# EAGLE board Millennium-Turkey.postroute (EAGLE 7.4.0)
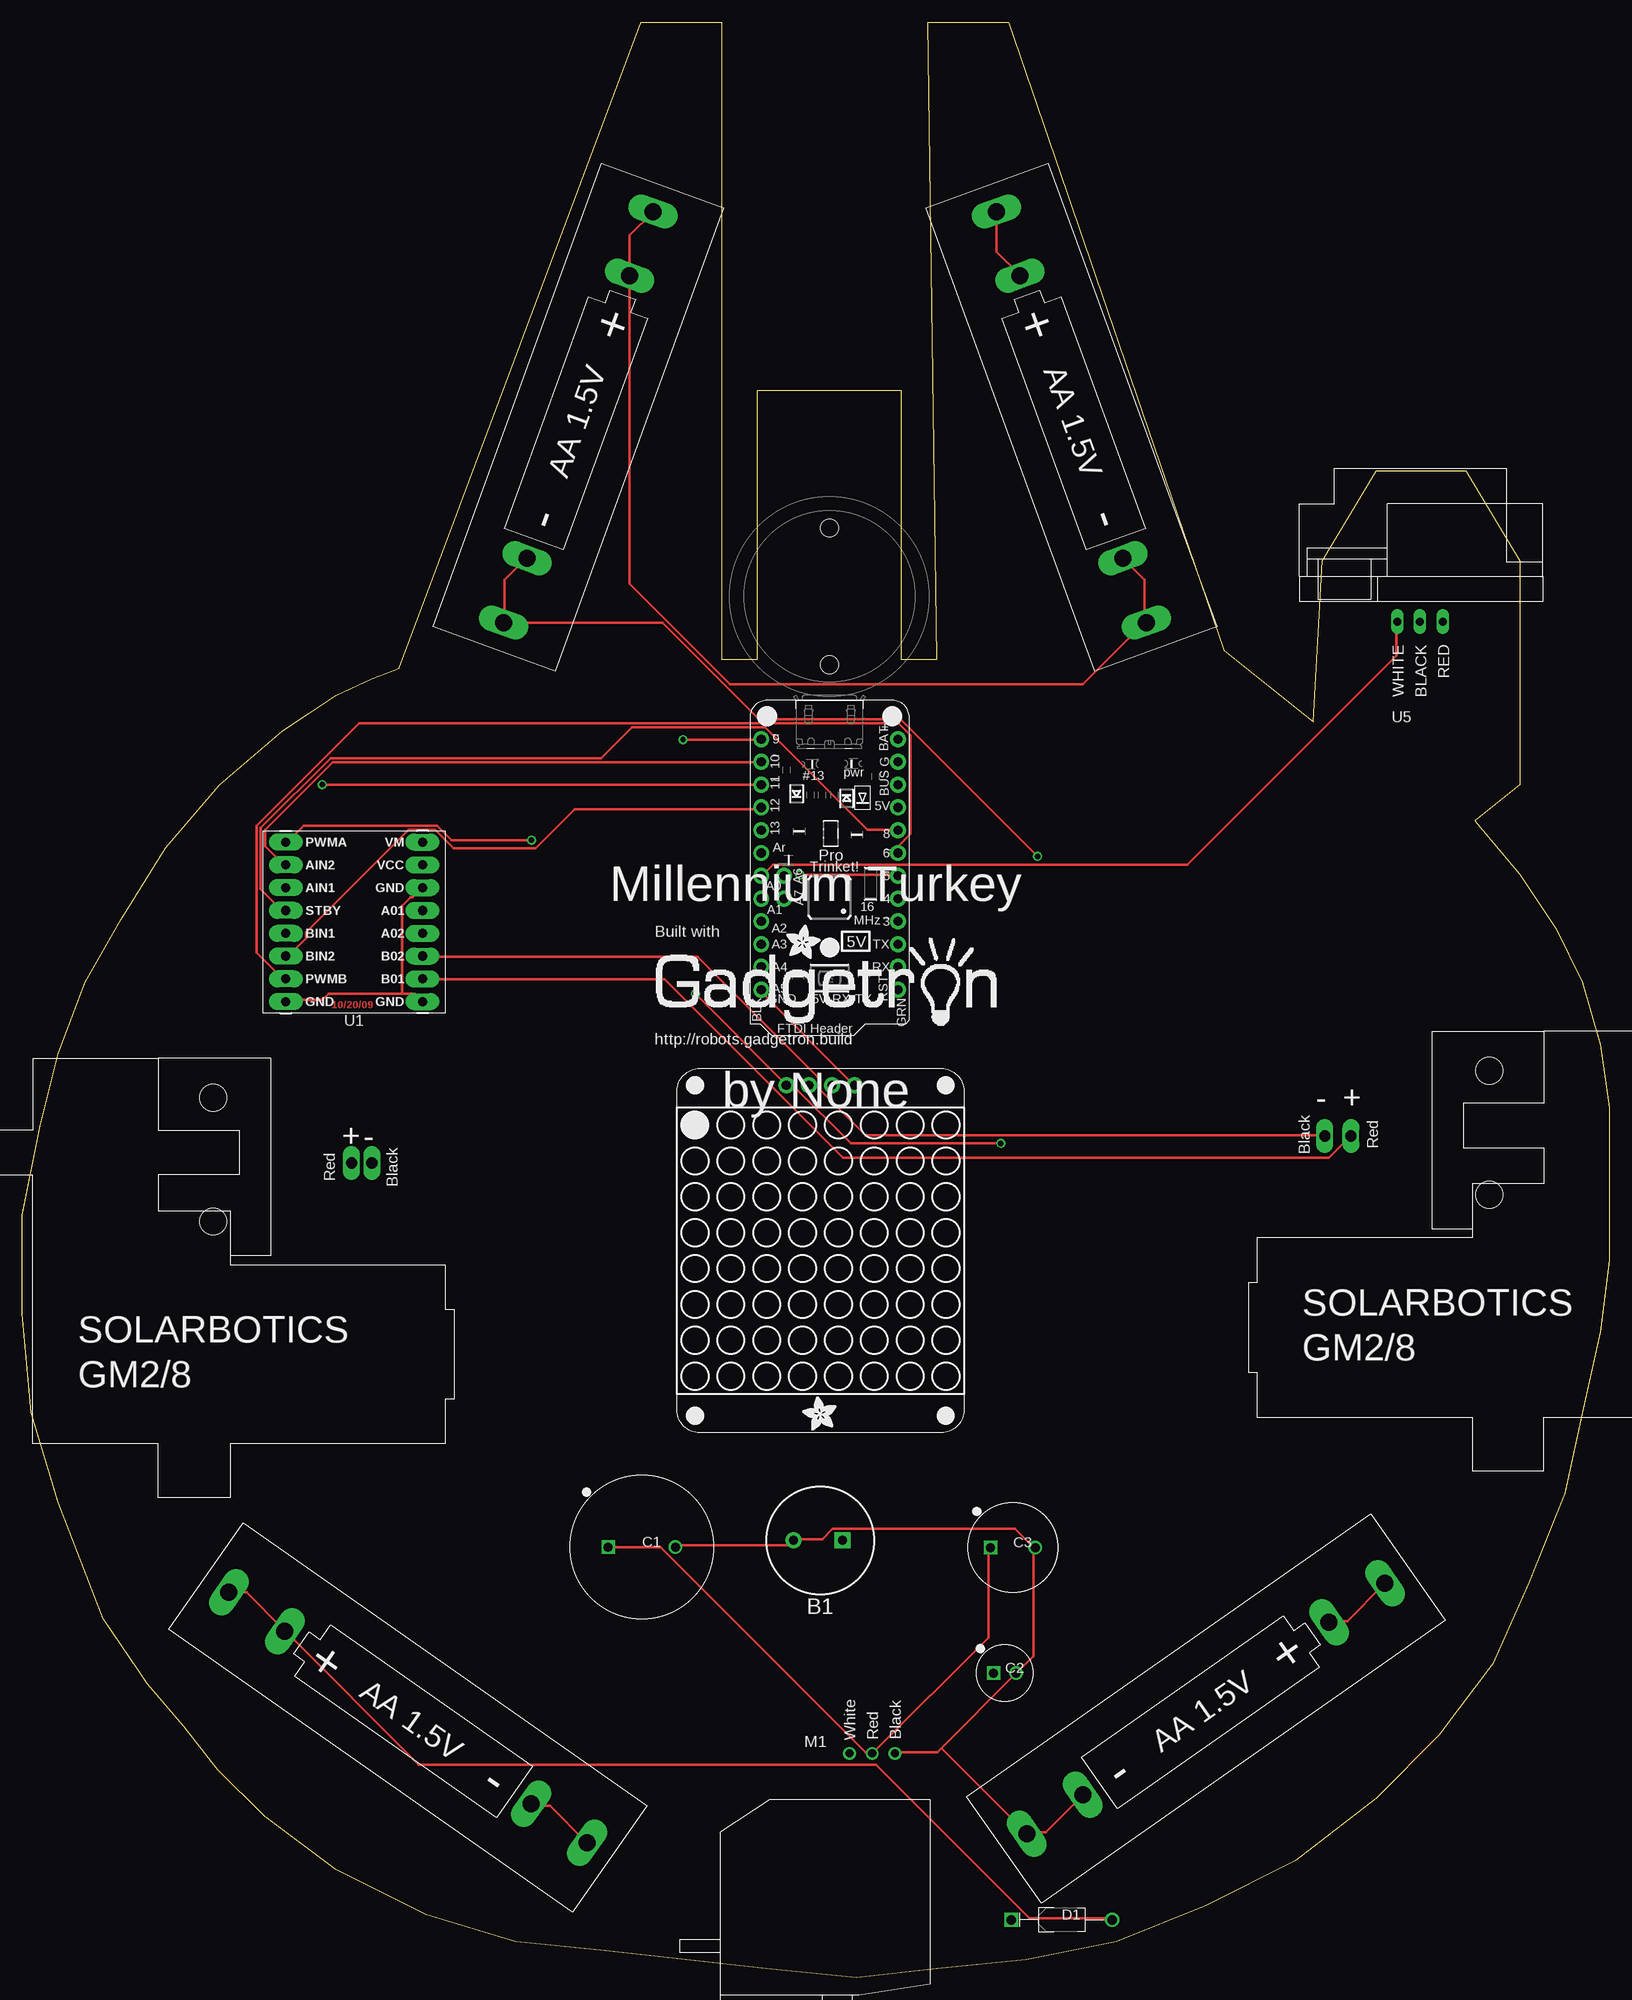
[diagram p0: board, top side]
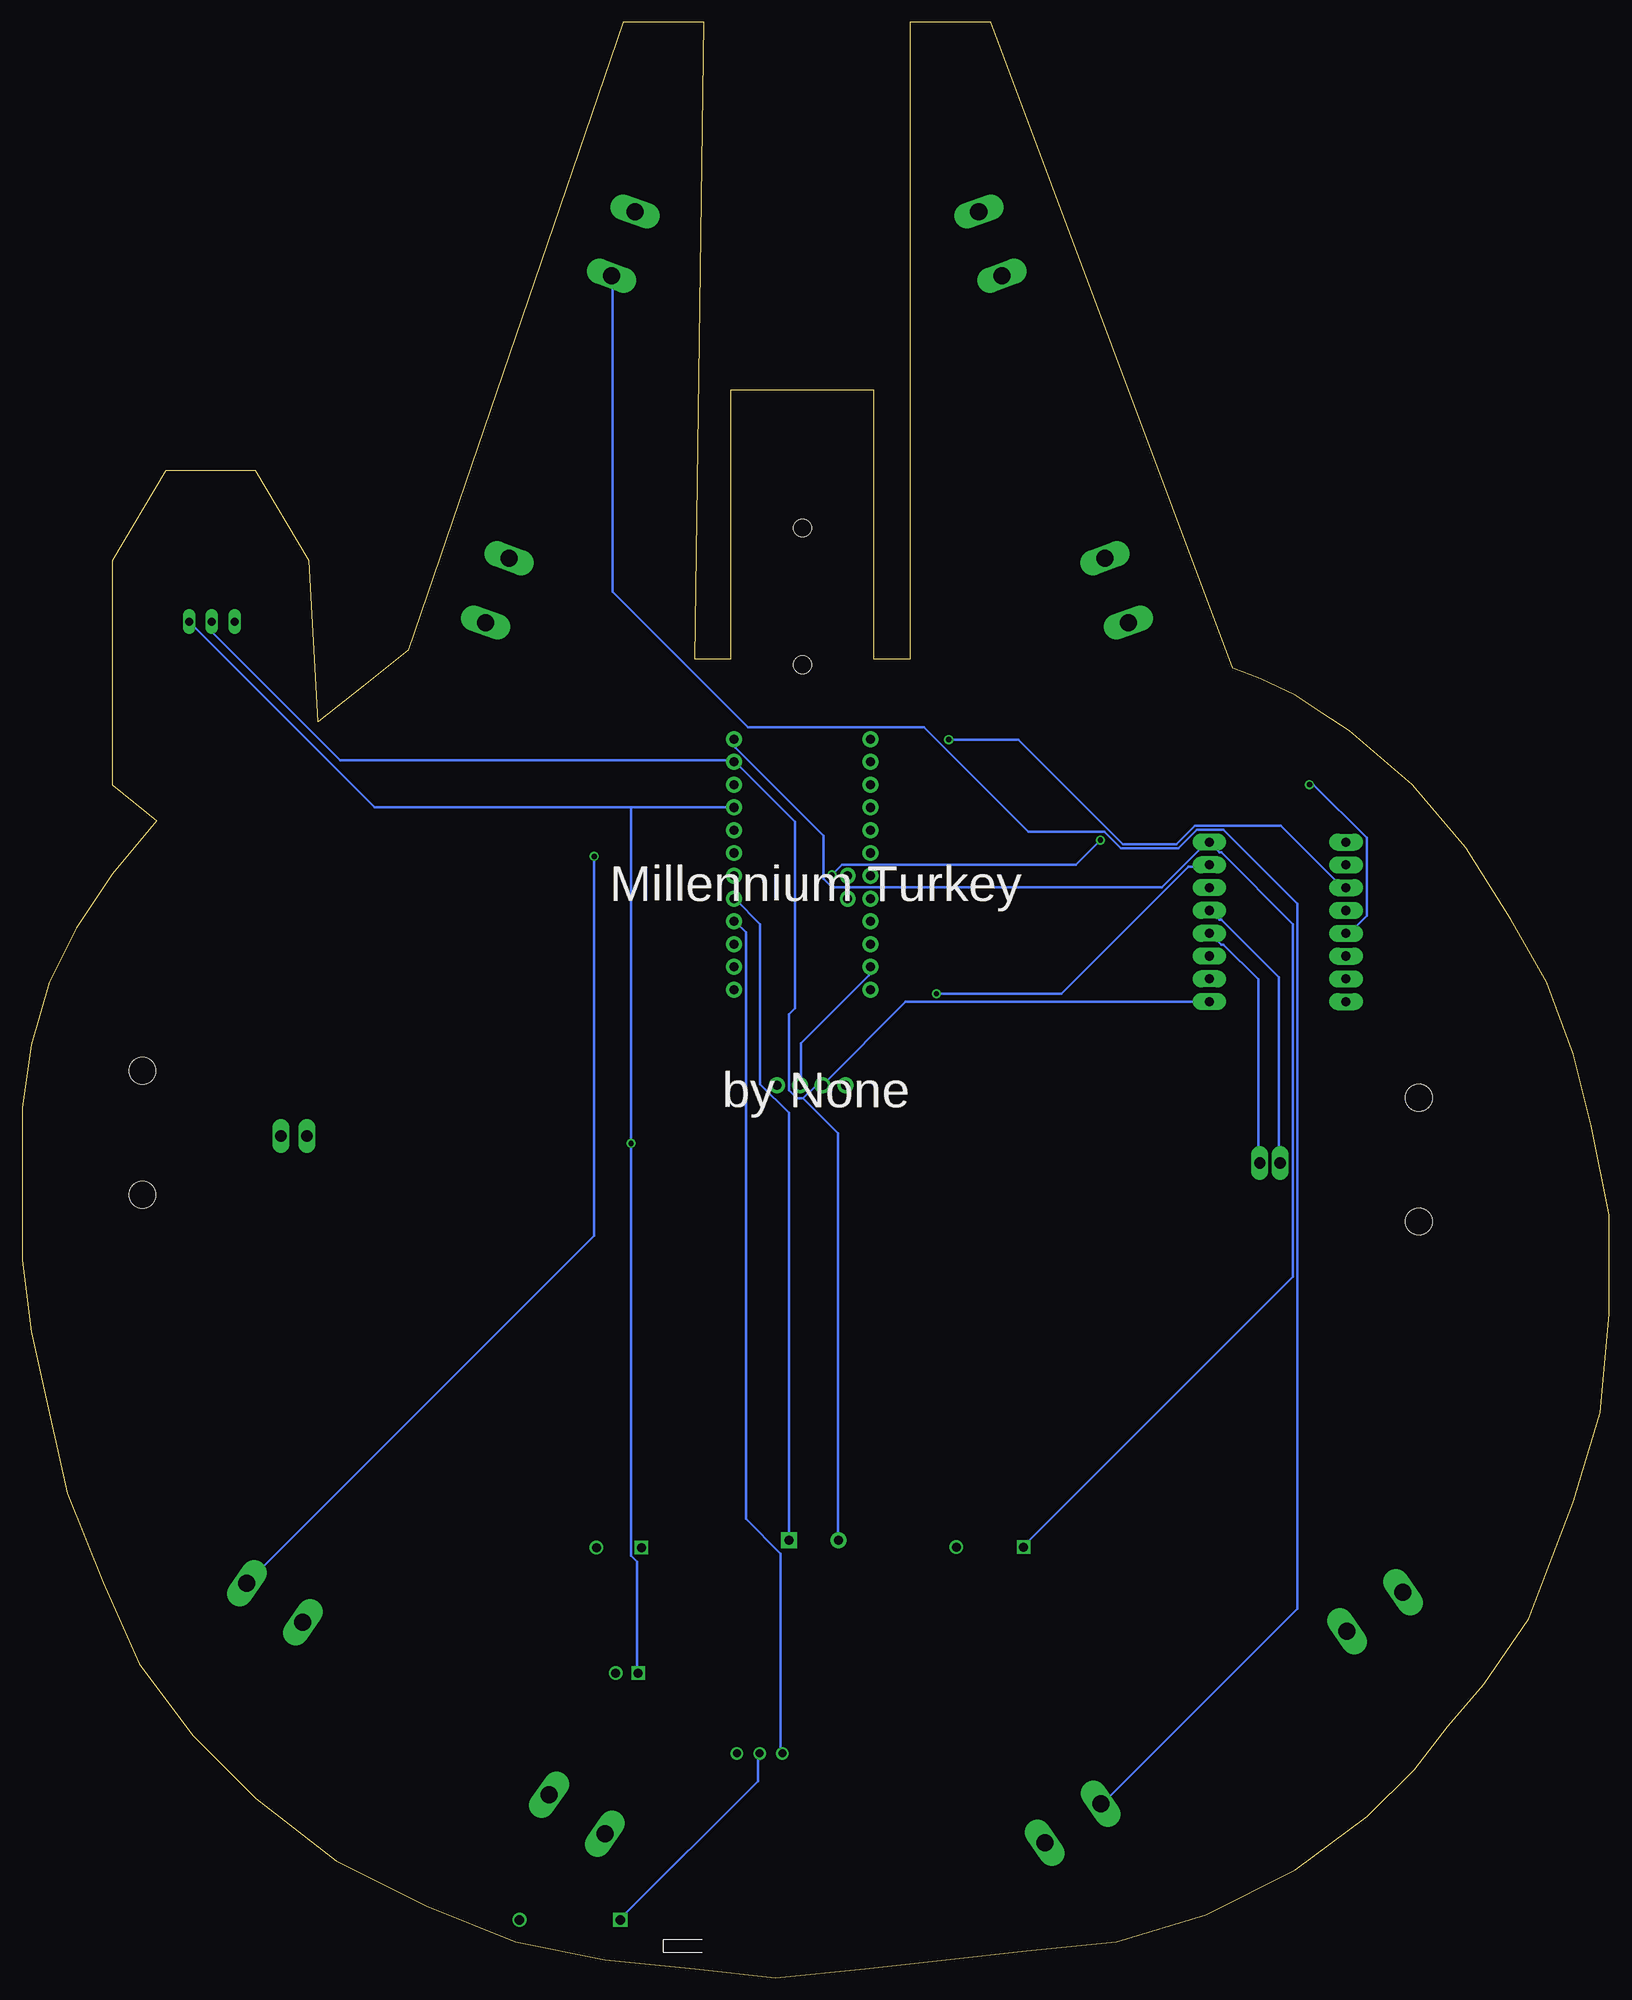
[diagram p1: board, bottom side, seen from below]

Size 177 x 218 mm. Coordinates in mm from the lower left corner, seen from the top.
Outline: 55,4 45,7 35,12 27,18 21.76,23.19 18,28 13.98,32.73 9,40 4,53 1,63 0,74 0,85 2,95 4,103 7,111 11,118 16,126 22,133 29,139 32,141 35,143 38.95,144.8 42,146 69,218 78,218 78,147 82,147 82,177 98,177 98,147 102,147 101,218 110,218 134,148 139,144 144,140 145,158 151,168 161,168 167,158 167,145 167,139 167,133 162,129 167,123 171,117 174,111 176,104 177,97 177,89 177,80 176,72 174,63 172,54 168,44 164,35 158,27 151,20 142,13 132,8 122,4 112,2 102,1 93,0 83,1 74,2 65,3 55,4
Copper layers (1*16): Top 0.035mm / dielectric 1.5mm / Bottom 0.035mm
Design rules "default": minimum track width 10mil, minimum drill 0.6mm, track to track 8mil, track to pad 8mil, pad to pad 8mil, via to via 8mil, smd to smd 8mil, copper to edge 40mil, drill to drill 8mil, minimum pad ring 10mil, minimum via ring 8mil, stop-mask expansion 4mil, vias tented up to drill 0mil, thermal gap 10mil

## Footprints (pad centres in the part's own frame; a part is rotated, then mirrored left to right if it is on the bottom)
BUZZER-12MM-ADAFRUIT-160 = drill 1 pad 1.778 square: + 2.5,0 | drill 1 pad 1.778: - -3,0
BATTERY-AA-BK-92 = drill 1.9 long: N1 16.765,0; N2 24.385,0; P1 -24.385,0; P2 -16.765,0
CAPPRD750W80D1600H2200P = drill 1 pad 1.5 square: 1 -3.75,0 | drill 1 pad 1.5: 2 3.75,0
CAPPRD250W80D630H1220P = drill 1 pad 1.5 square: 1 -1.25,0 | drill 1 pad 1.5: 2 1.25,0
CAPPRD500W80D1000H2200P = drill 1 pad 1.5 square: 1 -2.5,0 | drill 1 pad 1.5: 2 2.5,0
ADAFRUIT-3/4IN-CASTER = hole 2: -7.62,0; 7.62,0
DIOAD1125W78L520D270_HS = drill 1.06 pad 1.59: A 5.625,0 | drill 1.06 pad 1.59 square: C -5.625,0
SERVO_MICRO_SIDE_GLUE = drill 0.9: A1 8.97,-5.2; GND1 3.89,-5.2; PWR1 6.43,-5.2
SPARKFUN_DUAL_MOTOR_DRIVER = drill 1.016 pad 1.88 long: A01 7.62,1.27; A02 7.62,-1.27; AIN1 -7.62,3.81; AIN2 -7.62,6.35; B01 7.62,-6.35; B02 7.62,-3.81; BIN1 -7.62,-1.27; BIN2 -7.62,-3.81; GND -7.62,-8.89; GND1 7.62,3.81; GND2 7.62,-8.89; PWMA -7.62,8.89; PWMB -7.62,-6.35; STBY -7.62,1.27; VCC 7.62,6.35; VM 7.62,8.89
SOLARBOTICS_G2 = drill 1.27 long: + 40.545,-3.68; - 42.815,-3.68 | hole 3: 25.1,-10.2; 25.1,3.6
ADAFRUIT-PRO-TRINKET-5V-NOFTDI = drill 1.016 pad 1.778: +5V 7.62,24.13; A0 -7.62,16.51; A1 -7.62,13.97; A2 -7.62,11.43; A3 -7.62,8.89; A4 -7.62,6.35; A5 -7.62,3.81; AREF -7.62,19.05; D3 7.62,11.43; D4 7.62,13.97; D5 7.62,16.51; D6 7.62,19.05; D8 7.62,21.59; D9 -7.62,31.75; D10 -7.62,29.21; D11 -7.62,26.67; D12 -7.62,24.13; D13 -7.62,21.59; GND2 7.62,29.21; RESET 7.62,3.81; RXD1 7.62,6.35; TXD1 7.62,8.89; VBAT 7.62,31.75; VBUS1 7.62,26.67 | drill 1 pad 1.778: A6 -5.08,16.51; A7 -5.08,13.97
SOLARBOTICS_G2_LEFT = drill 1.27 long: + -40.545,-3.68; - -43.45,-3.68 | hole 3: -25.1,-10.2; -25.1,3.6
ANALOG_DISTANCE_SENSOR_GLUE_MOUNT = drill 0.9 long: GND 0.18,-9.977; VCC 2.72,-9.977; VO -2.36,-9.977
ADAFRUIT-1.2IN-8X8-LED-BACKPACK = drill 1.016 pad 1.778: GND -18.415,-1.27; SCL -18.415,3.81; SDA -18.415,1.27; VDD -18.415,-3.81

## Placement (x,y rotation side)
B1  BUZZER-ADAFRUIT-160  [BUZZER-12MM-ADAFRUIT-160]  88.98,48.75 0 top
BATT1  BATTERY-AA-CLIP  [BATTERY-AA-BK-92]  132,30 215 top
BATT2  BATTERY-AA-CLIP  [BATTERY-AA-BK-92]  117,174 290 top
BATT3  BATTERY-AA-CLIP  [BATTERY-AA-BK-92]  43,29 325 top
BATT4  BATTERY-AA-CLIP  [BATTERY-AA-BK-92]  62,174 250 top
C1  3300uF  [CAPPRD750W80D1600H2200P]  69.08,48 0 top
C2  100uF  [CAPPRD250W80D630H1220P]  109.57,33.95 0 top
C3  1000uF  [CAPPRD500W80D1000H2200P]  110.47,47.95 0 top
CASTER1  CASTERADAFRUIT-3/4IN  [ADAFRUIT-3/4IN-CASTER]  90,154 270 top
D1  [DIOAD1125W78L520D270_HS]  115.93,6.44 0 top
LOGO  [BUILT_WITH_GADGETRON]  88.5,109 0 top
M1  SERVO-MICRO_SIDE_GLUE  [SERVO_MICRO_SIDE_GLUE]  101.21,19.8 180 top
U1  SPARKFUN_DUAL_MOTOR_DRIVER-BOB  [SPARKFUN_DUAL_MOTOR_DRIVER]  37,117.71 0 top
U2  SOLARBOTICS_GM2  [SOLARBOTICS_G2]  -3.83,94.5 0 top
U3  ADAFRUIT-PRO-TRINKET-5V-NOFTDI  [ADAFRUIT-PRO-TRINKET-5V-NOFTDI]  90.03,106.34 0 top
U4  SOLARBOTICS_GM2_LEFT  [SOLARBOTICS_G2_LEFT]  188.71,97.5 0 top
U5  ANALOG_DISTANCE_SENSOR-GLUE  [ANALOG_DISTANCE_SENSOR_GLUE_MOUNT]  155.69,161.16 0 top
U6  ADAFRUIT-1.2IN-8X8-LED-BACKPACK-WHITE  [ADAFRUIT-1.2IN-8X8-LED-BACKPACK]  89.01,81.06 270 top

## Library data of the parts
B1 = Components; DIST: Adafruit; DISTPN: 160; HIERARCHY_NAME: buzzer.u1; ROUGH_HEIGHT: 7
BATT1 = Components; DIST: Digikey; DISTPN: BK-92-ND; HIERARCHY_NAME: battery.BATT4; QTY: 2; ROUGH_HEIGHT: 16
BATT2 = Components; DIST: Digikey; DISTPN: BK-92-ND; HIERARCHY_NAME: battery.BATT2; QTY: 2; ROUGH_HEIGHT: 16
BATT3 = Components; DIST: Digikey; DISTPN: BK-92-ND; HIERARCHY_NAME: battery.BATT1; QTY: 2; ROUGH_HEIGHT: 16
BATT4 = Components; DIST: Digikey; DISTPN: BK-92-ND; HIERARCHY_NAME: battery.BATT3; QTY: 2; ROUGH_HEIGHT: 16
C1 = KoalaBuild; DATASHEET: http://industrial.panasonic.com/www-cgi/jvcr13pz.cgi?E+PZ+3+ABA0012+ECA1EM332+7+WW; DATA_SHEET: http://industrial.panasonic.com/www-cgi/jvcr13pz.cgi?E+PZ+3+ABA0012+ECA1EM332+7+WW; DB: /Users/swanson/research/NVSL/src/with-git/gtron_devel/Gadgets/Tools/Koala/Koala/PartLibrary/Digikey/Capacitors-AluminumTH.csv; DEVICE: TH-RADIAL_ALUMINUM_16MM; DIST: Digikey; DISTPN: P5158-ND; HIERARCHY_NAME: drive.C1; IMAGE: http://media.digikey.com/Photos/Panasonic%20Photos/ECA-1CM472.jpg; MFR: Panasonic Electronic Components; MIN_QTY: 1; MPN: ECA-1EM332; PACKAGE: CAPPRD750W80D1600H2200P; PRICE: $1.13; SIZE: TH; STOCK: STOCK; TOL: 20%; VALUE_QUERY: >3000uF; VOLTS: ( >= 5)V
C2 = KoalaBuild; DATASHEET: http://industrial.panasonic.com/www-cgi/jvcr13pz.cgi?E+PZ+3+ABA0012+ECA1EM101+7+WW; DATA_SHEET: http://industrial.panasonic.com/www-cgi/jvcr13pz.cgi?E+PZ+3+ABA0012+ECA1EM101+7+WW; DB: /Users/swanson/research/NVSL/src/with-git/gtron_devel/Gadgets/Tools/Koala/Koala/PartLibrary/Digikey/Capacitors-AluminumTH.csv; DEVICE: TH-RADIAL_ALUMINUM_6.3MM; DIST: Digikey; DISTPN: P5152-ND; HIERARCHY_NAME: distanceSensor.C1; IMAGE: http://media.digikey.com/Photos/Panasonic%20Photos/ECA-1EM101B.JPG; MFR: Panasonic Electronic Components; MIN_QTY: 1; MPN: ECA-1EM101; PACKAGE: CAPPRD250W80D630H1220P; PRICE: $0.25; SIZE: TH; STOCK: STOCK; TOL: 20%; VALUE_QUERY: >10uF; VOLTS: ( >= 5)V
C3 = KoalaBuild; DATASHEET: http://industrial.panasonic.com/www-cgi/jvcr13pz.cgi?E+PZ+3+ABA0012+ECA1EM102+7+WW; DATA_SHEET: http://industrial.panasonic.com/www-cgi/jvcr13pz.cgi?E+PZ+3+ABA0012+ECA1EM102+7+WW; DB: /Users/swanson/research/NVSL/src/with-git/gtron_devel/Gadgets/Tools/Koala/Koala/PartLibrary/Digikey/Capacitors-AluminumTH.csv; DEVICE: TH-RADIAL_ALUMINUM_10MM; DIST: Digikey; DISTPN: P5156-ND; HIERARCHY_NAME: Servo.C1; IMAGE: http://media.digikey.com/Photos/Panasonic%20Photos/ECA-1AM102B.JPG; MFR: Panasonic Electronic Components; MIN_QTY: 1; MPN: ECA-1EM102; PACKAGE: CAPPRD500W80D1000H2200P; PRICE: $0.68; SIZE: TH; STOCK: STOCK; TOL: 20%; VALUE_QUERY: > 1000uF; VOLTS: ( >= 5)V
CASTER1 = Components; DIST: Adafruit; DISTPN: 1200; HIERARCHY_NAME: caster.u1; ROUGH_HEIGHT: 6.5
D1 = KoalaBuild; DATASHEET: http://www.st.com/web/en/resource/technical/document/datasheet/CD00001625.pdf; DATA_SHEET: http://www.st.com/web/en/resource/technical/document/datasheet/CD00001625.pdf; DB: /home/buildserver/gtron_devel/Gadgets/Tools/Koala/Koala/PartLibrary/Digikey/Schottky-Diodes-TH.csv; DEVICE: TH-DO-41-AND-DO-204AL; DIST: Digikey; DISTPN: 497-4547-1-ND; HIERARCHY_NAME: battery.D1; IMAGE: http://media.digikey.com/photos/STMicro%20Photos/1N5819.JPG; IRECT: 1A; MFR: STMicroelectronics; MIN_QTY: 1; MPN: 1N5817; PACKAGE: DIOAD1125W78L520D270_HS; PRICE: $0.57; SIZE: TH; STOCK: STOCK; VALUE: 450mV; VREV: 20V
LOGO = Artwork
M1 = Components; DIST: Gadgetron; DISTPN: side-servo; HIERARCHY_NAME: Servo.U1; ROUGH_HEIGHT: 20
U1 = BOBs; DIST: Sparkfun; DISTPN: 9457-assembly; HIERARCHY_NAME: drive.DRVR; ROUGH_HEIGHT: 15
U2 = Components; DIST: Solarbotics; DISTPN: gm2-assembly; HIERARCHY_NAME: drive.R; ROUGH_HEIGHT: 26
U3 = BOBs; DIST: Adafruit; DISTPN: 2000; HIERARCHY_NAME: brain.U1; ROUGH_HEIGHT: 22
U4 = Components; DIST: Solarbotics; DISTPN: gm2-assembly; HIERARCHY_NAME: drive.L; ROUGH_HEIGHT: 26
U5 = Components; DIST: Pololu; DISTPN: 2450; HIERARCHY_NAME: distanceSensor.D1; ROUGH_HEIGHT: 13.4
U6 = BOBs; DIST: Adafruit; DISTPN: 1614; HIERARCHY_NAME: display.u1; ROUGH_HEIGHT: 21

## Nets
+5V_0_BRAIN: C2.1 U1.VCC U3.+5V U5.VCC U6.VDD
A0_0_BRAIN: U3.A0 U5.VO
A1_0_BRAIN: U3.A1
A01_2_DRIVE: U1.A01 U2.+
A2_0_BRAIN: U3.A2
A02_2_DRIVE: U1.A02 U2.-
A3_0_BRAIN: U3.A3
A4_0_BRAIN: U3.A4 U6.SDA
A5_0_BRAIN: U3.A5 U6.SCL
A6_0_BRAIN: U3.A6
A7_0_BRAIN: U3.A7
AREF_0_BRAIN: U3.AREF
B01_2_DRIVE: U1.B01 U4.+
B02_2_DRIVE: U1.B02 U4.-
D3_0_BRAIN: M1.A1 U3.D3
D4_0_BRAIN: B1.+ U3.D4
D5_0_BRAIN: U1.PWMA U3.D5
D6_0_BRAIN: U1.PWMB U3.D6
D8_0_BRAIN: U1.STBY U3.D8
D9_0_BRAIN: U1.AIN1 U3.D9
D10_0_BRAIN: U1.AIN2 U3.D10
D11_0_BRAIN: U1.BIN1 U3.D11
D12_0_BRAIN: U1.BIN2 U3.D12
D13_0_BRAIN: U3.D13
GND_0_BRAIN: B1.- BATT1.N1 BATT1.N2 C1.2 C2.2 C3.2 M1.GND1 U1.GND U1.GND1 U1.GND2 U3.GND2 U5.GND U6.GND
N$1_1_BATTERY: BATT2.P1 BATT2.P2 BATT3.N1 BATT3.N2
N$2_1_BATTERY: BATT2.N1 BATT2.N2 BATT4.P1 BATT4.P2
N$3_1_BATTERY: BATT1.P1 BATT1.P2 BATT4.N1 BATT4.N2
N$4_1_BATTERY: BATT3.P1 BATT3.P2 D1.A
POS_1_BATTERY: C1.1 C3.1 D1.C M1.PWR1 U1.VM U3.VBAT
RESET_0_BRAIN: U3.RESET
RXD1_0_BRAIN: U3.RXD1
TXD1_0_BRAIN: U3.TXD1
VBUS1_0_BRAIN: U3.VBUS1

## Tracks (layer width: path | path; a pad name or v marks a point on that pad's centre or on a via)
+5V_0_BRAIN  (via drill 0.6)
  Top 0.254: v75.06,109.69 85.12,99.63 U6.VDD 85.34,99.41 86.03,99.41 92.43,93 v109.12,93
  Bottom 0.254: U1.VCC 44.65,123.87 46.94,123.87 61.11,109.69 v75.06,109.69 | U3.+5V 97.69,130.49 109.12,130.49 | C2.1 108.43,34.02 108.43,46.37 109.12,47.05 v109.12,93 109.12,130.49 | 109.12,130.49 137.69,130.49 158.27,151.07 U5.VCC
A0_0_BRAIN
  Top 0.254: U5.VO 153.24,151.07 153.24,147.41 129.92,124.09 83.74,124.09 82.6,122.95 U3.A0
A01_2_DRIVE
  Bottom 0.254: U1.A01 44.42,118.84 43.51,117.92 43.28,117.92 36.88,111.52 36.88,90.95 U2.+
A02_2_DRIVE
  Bottom 0.254: U1.A02 44.42,116.32 43.28,115.18 43.05,115.18 39.17,111.29 39.17,90.95 U2.-
A4_0_BRAIN
  Bottom 0.254: U6.SDA 90.14,99.63 90.14,104.2 82.6,111.75 82.6,112.66 U3.A4
A5_0_BRAIN
  Top 0.254: U6.SCL 92.66,99.63 82.6,109.69 82.6,110.15 U3.A5
B01_2_DRIVE
  Top 0.254: U1.B01 44.65,111.29 71.63,111.29 91.52,91.4 145.69,91.4 147.98,93.69 U4.+
B02_2_DRIVE
  Top 0.254: U1.B02 44.65,113.81 75.29,113.81 89,100.09 89,98.95 94.03,93.92 145.24,93.92 U4.-
D3_0_BRAIN
  Bottom 0.254: M1.A1 92.43,25.11 92.43,47.28 96.32,51.17 96.32,116.55 97.46,117.69 U3.D3
D4_0_BRAIN
  Bottom 0.254: B1.+ 91.52,48.88 91.52,96.43 94.72,99.63 94.72,117.46 97.46,120.21 U3.D4
D5_0_BRAIN  (via drill 0.6)
  Top 0.254: v56.77,126.84 47.85,126.84 46.25,128.44 31.4,128.44 29.57,126.61 U1.PWMA | v86.72,122.95 97.46,122.95 U3.D5
  Bottom 0.254: v56.77,126.84 59.51,124.09 85.57,124.09 v86.72,122.95
D6_0_BRAIN
  Top 0.254: U1.PWMB 29.34,111.52 28.88,111.52 26.14,114.26 26.14,128.44 37.57,139.87 97.69,139.87 99.06,138.5 99.06,127.52 97.69,126.15 97.69,125.47 U3.D6
D8_0_BRAIN
  Top 0.254: U1.STBY 29.34,119.06 28.88,119.06 26.59,121.35 26.59,128.21 34.37,135.98 64.54,135.98 67.97,139.41 82.83,139.41 94.26,127.98 97.46,127.98 U3.D8
D9_0_BRAIN  (via drill 0.6)
  Top 0.254: v73.69,138.04 82.37,138.04 U3.D9
  Bottom 0.254: U1.AIN1 29.57,121.35 36.65,128.44 46.25,128.44 48.31,126.38 54.25,126.38 65.91,138.04 v73.69,138.04
D10_0_BRAIN
  Top 0.254: U1.AIN2 29.34,123.87 27.05,126.15 27.05,127.98 34.59,135.52 82.37,135.52 U3.D10
D11_0_BRAIN  (via drill 0.6)
  Top 0.254: v33.45,133.01 82.37,133.01 U3.D11
  Bottom 0.254: v33.45,133.01 32.99,133.01 27.05,127.06 27.05,118.38 28.88,116.55 29.34,116.55 U1.BIN1
D12_0_BRAIN
  Top 0.254: U1.BIN2 29.57,113.81 31.62,115.86 31.62,116.55 43.05,127.98 46.02,127.98 48.08,125.92 57.23,125.92 61.57,130.27 82.37,130.27 U3.D12
GND_0_BRAIN
  Top 0.254: U1.GND2 44.42,109.01 43.74,109.69 42.37,109.69 | U1.GND1 44.42,121.35 43.51,120.44 43.28,120.44 42.37,119.52 42.37,109.69 | 42.37,109.69 34.14,109.69 33.45,109.01 29.57,109.01 U1.GND | C1.2 73,48.2 85.34,48.2 85.8,48.66 B1.- 86.03,48.88 89.23,48.88 90.37,50.03 110.72,50.03 112.78,47.97 C3.2 112.78,47.74 112.78,35.85 110.95,34.02 C2.2 110.72,33.8 102.49,25.57 | M1.GND1 97.46,25.11 102.03,25.11 102.49,25.57 | 102.49,25.57 111.86,16.19 BATT1.N2 112.09,16.19 114.15,16.19 118.26,20.31 BATT1.N1
  Bottom 0.254: U1.GND2 44.65,108.78 78.49,108.78 87.63,99.63 U6.GND 87.86,99.41 88.55,99.41 89.92,98.03 | B1.- 86.03,48.88 86.03,94.15 89.92,98.03 | 89.92,98.03 90.6,98.03 91.52,98.95 91.52,107.41 90.83,108.09 90.83,128.89 97.46,135.52 U3.GND2 97.69,135.75 141.58,135.75 155.75,149.93 155.75,151.07 U5.GND
N$1_1_BATTERY
  Top 0.254: BATT3.N2 62.94,15.05 58.83,19.17 56.77,19.17 BATT3.N1 | BATT2.P1 108.66,196.79 108.66,192.44 111.18,189.93 BATT2.P2
  Bottom 0.254: BATT3.N1 56.54,19.4 34.82,41.11 34.82,119.75 43.05,127.98 46.02,127.98 48.08,125.92 54.48,125.92 56.31,127.75 64.77,127.75 76.43,139.41 96.09,139.41 111.18,154.5 111.18,189.7 BATT2.P2
N$2_1_BATTERY
  Top 0.254: BATT4.P1 70.26,196.79 67.74,194.27 67.74,189.93 BATT4.P2 67.74,189.7 67.74,155.41 78.94,144.21 118.26,144.21 125.12,151.07 BATT2.N2 125.12,151.3 125.12,155.87 122.84,158.16 BATT2.N1
N$3_1_BATTERY  (via drill 0.6)
  Top 0.254: BATT4.N1 56.08,158.16 53.8,155.87 53.8,151.3 BATT4.N2 53.8,151.07 71.4,151.07 82.14,140.32 97.92,140.32 v113.23,125.01 | BATT1.P2 145.92,39.74 147.75,39.74 151.87,43.86 BATT1.P1
  Bottom 0.254: v113.23,125.01 113.23,82.72 151.87,44.08 BATT1.P1
N$4_1_BATTERY
  Top 0.254: BATT3.P1 23.16,42.94 24.99,42.94 29.11,38.83 BATT3.P2 29.34,38.6 44.2,23.74 95.17,23.74 112.32,6.59 121.46,6.59 D1.A
POS_1_BATTERY
  Top 0.254: C1.1 65.46,47.97 71.17,47.97 94.03,25.11 94.72,25.11 M1.PWR1 94.95,25.11 107.75,37.91 107.75,47.74 C3.1
  Bottom 0.254: C1.1 65.23,48.2 35.28,78.14 35.28,117.46 43.28,125.47 43.51,125.47 44.42,126.38 U1.VM 44.65,126.38 45.11,126.38 49.91,121.58 86.72,121.58 87.63,122.49 87.63,127.29 97.46,137.12 97.46,138.04 U3.VBAT | M1.PWR1 94.95,24.88 94.95,21.91 110.26,6.59 D1.C

## Text on the board
tPlace: Millennium Turkey | by None
bPlace: Millennium Turkey | by None